# EAGLE board xr_vco_pots (EAGLE 7.3.0)
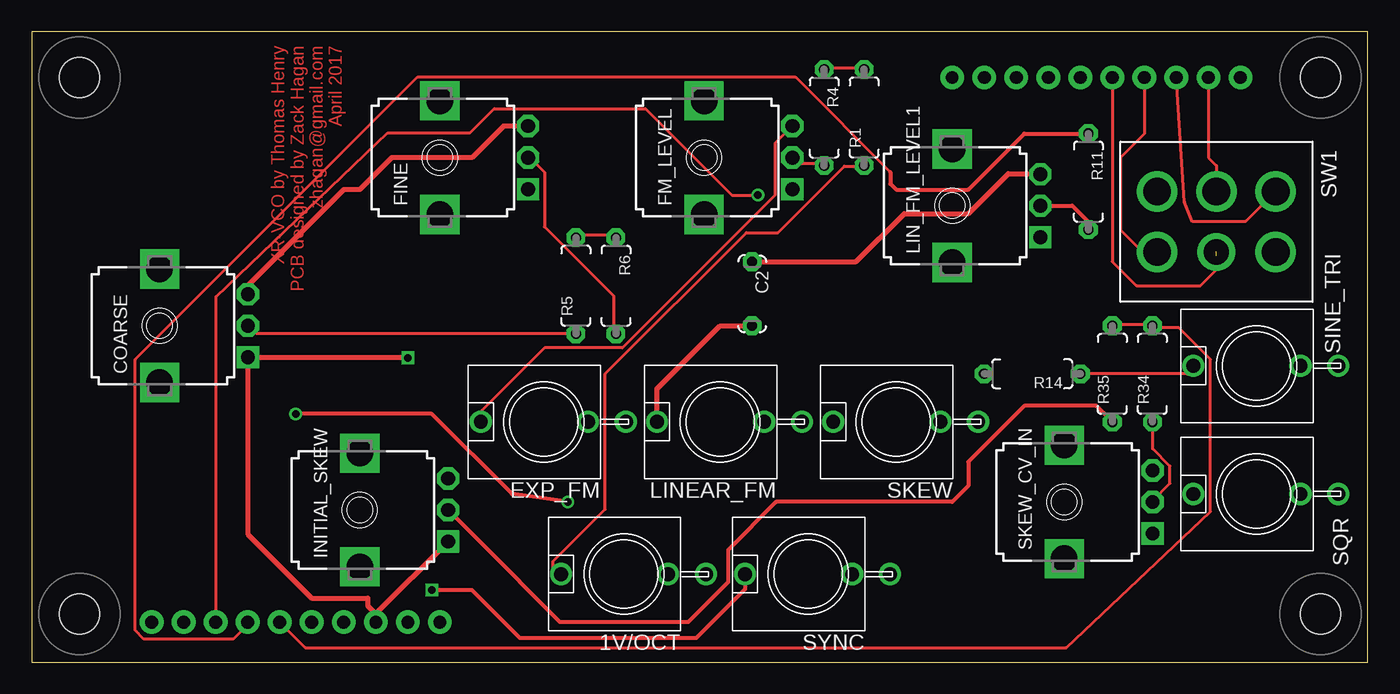
[diagram p0: board, top side]
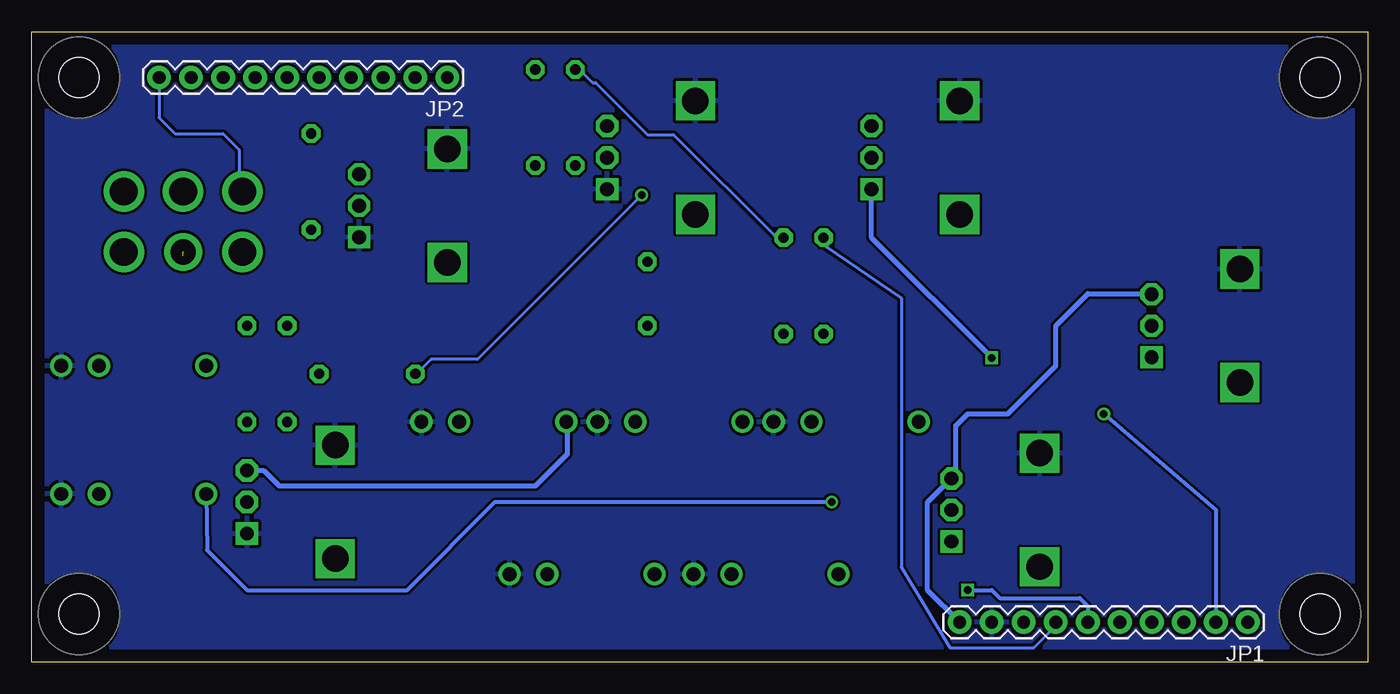
[diagram p1: board, bottom side, seen from below]

Size 106 x 50 mm. Coordinates in mm from the lower left corner, seen from the top.
Outline: 0,0 106,0 106,50 0,50 0,0
Copper layers (1*16): Top 0.035mm / dielectric 1.5mm / Bottom 0.035mm
Design rules "default *": minimum track width 10mil, minimum drill 19mil, track to track 8mil, track to pad 8mil, pad to pad 8mil, via to via 8mil, smd to smd 8mil, copper to edge 40mil, drill to drill 9mil, minimum pad ring 13mil, minimum via ring 8mil, stop-mask expansion 4mil, vias tented up to drill 0mil, thermal gap 10mil
Net classes: 1 power: width 0.406 mm; 2 ground: width 0.305 mm

## Footprints (pad centres in the part's own frame; a part is rotated, then mirrored left to right if it is on the bottom)
WQP-PJ301M-12_JACK = drill 1.1: P$1_TIP 0,5; P$2_SWITCH 0,-3.5; P$3_SLEEVE 0,-6.5
C050-024X044 = drill 0.813 octagon: 1 -2.54,0; 2 2.54,0
9MM_SNAP-IN_POT = drill 1.1 pad 1.676 square: 1 -2.5,-7 | drill 1.1 pad 1.676 octagon: 2 0,-7; 3 2.5,-7 | drill 2.1 pad 2.8 square: CHASSIS1 -4.5,0; CHASSIS2 4.5,0
1X10 = drill 1.016 pad 1.88: 1 0,0; 2 2.54,0; 3 5.08,0; 4 7.62,0; 5 10.16,0; 6 12.7,0; 7 15.24,0; 8 17.78,0; 9 20.32,0; 10 22.86,0
7MM_RESISTOR = drill 0.813 octagon: 1 -3.81,0; 2 3.81,0
DPDT = drill 2.2: A1 -2.4,4.7; A2 -2.4,0; A3 -2.4,-4.7; B1 2.4,4.7; B3 2.4,-4.7 | drill 2: B2 2.4,0
MOUNTING_HOLE = hole 3.2: 0,0

## Placement (x,y rotation side)
1V/OCT  THONKICONNNEW  [WQP-PJ301M-12_JACK]  46.99,6.99 90 top
C2  220nf  [C050-024X044]  57.15,29.21 270 top
COARSE  100k  [9MM_SNAP-IN_POT]  10.16,26.67 90 top
EXP_FM  THONKICONNNEW  [WQP-PJ301M-12_JACK]  40.64,19.05 90 top
FINE  100k  [9MM_SNAP-IN_POT]  32.38,40.01 90 top
FM_LEVEL  100k  [9MM_SNAP-IN_POT]  53.34,40.01 90 top
INITIAL_SKEW  100k  [9MM_SNAP-IN_POT]  26.04,12.06 90 top
JP1  M10"  [1X10]  9.53,3.17 180 bottom
JP2  M10"  [1X10]  73.03,46.35 180 bottom
LIN_FM_LEVEL1  100k  [9MM_SNAP-IN_POT]  73.03,36.2 90 top
LINEAR_FM  THONKICONNNEW  [WQP-PJ301M-12_JACK]  54.61,19.05 90 top
R1  100k  [7MM_RESISTOR]  66.04,43.18 90 top
R4  100k  [7MM_RESISTOR]  62.87,43.18 270 top
R5  100k  [7MM_RESISTOR]  43.18,29.84 90 top
R6  2.4M  [7MM_RESISTOR]  46.35,29.84 270 top
R11  100k  [7MM_RESISTOR]  83.82,38.1 270 top
R14  1k  [7MM_RESISTOR]  79.38,22.86 180 top
R34  100k  [7MM_RESISTOR]  88.9,22.86 90 top
R35  330k  [7MM_RESISTOR]  85.72,22.86 90 top
SINE_TRI  THONKICONNNEW  [WQP-PJ301M-12_JACK]  97.16,23.5 90 top
SKEW  THONKICONNNEW  [WQP-PJ301M-12_JACK]  68.58,19.05 90 top
SKEW_CV_IN  100k  [9MM_SNAP-IN_POT]  81.92,12.7 90 top
SQR  THONKICONNNEW  [WQP-PJ301M-12_JACK]  97.16,13.34 90 top
SW1  DPDT  [DPDT]  93.98,34.92 270 top
SYNC  THONKICONNNEW  [WQP-PJ301M-12_JACK]  61.59,6.99 90 top
U$1  [MOUNTING_HOLE]  3.81,46.35 0 top
U$2  [MOUNTING_HOLE]  3.81,3.81 0 top
U$3  [MOUNTING_HOLE]  102.23,46.35 0 top
U$4  [MOUNTING_HOLE]  102.23,3.81 0 top

## Library data of the parts
1V/OCT COARSE EXP_FM FINE FM_LEVEL INITIAL_SKEW LIN_FM_LEVEL1 LINEAR_FM R1 R4-R6 R11 R14 R34 R35 SINE_TRI SKEW SKEW_CV_IN SQR SYNC U$1-U$4 = MusicThingModular
C2 = TomW
JP1 JP2 = SparkFun-Connectors
SW1 = gm-switches

## Nets
+12V: COARSE.3 FINE.3 INITIAL_SKEW.3 JP1.10
-12V: COARSE.1 FINE.1 INITIAL_SKEW.1 JP1.8
GND: 1V/OCT.P$3_SLEEVE COARSE.CHASSIS2 EXP_FM.P$3_SLEEVE FINE.CHASSIS2 FM_LEVEL.1 FM_LEVEL.CHASSIS2 INITIAL_SKEW.CHASSIS2 JP1.9 LIN_FM_LEVEL1.1 LIN_FM_LEVEL1.CHASSIS2 LINEAR_FM.P$3_SLEEVE SINE_TRI.P$3_SLEEVE SKEW.P$3_SLEEVE SKEW_CV_IN.1 SKEW_CV_IN.CHASSIS2 SQR.P$3_SLEEVE SYNC.P$3_SLEEVE
LIN_FM_CV: JP1.4 R11.1
N$1: 1V/OCT.P$1_TIP R1.1
N$2: EXP_FM.P$1_TIP FM_LEVEL.3
N$3: FM_LEVEL.2 R4.2
N$4: COARSE.2 R5.1
N$5: FINE.2 R6.2
N$17: LIN_FM_LEVEL1.2 R11.2
N$18: R14.1 SINE_TRI.P$1_TIP
N$19: C2.1 LIN_FM_LEVEL1.3
N$20: C2.2 LINEAR_FM.P$1_TIP
N$42: SKEW.P$1_TIP SKEW_CV_IN.3
N$43: R34.1 SKEW_CV_IN.2
N$44: INITIAL_SKEW.2 R35.1
PITCH_CV: JP1.7 R1.2 R4.1 R5.2 R6.1
SINE_TRI_OUT: JP1.3 R14.2
SKEW_IN: JP1.5 R34.2 R35.2
SQR_OUT: JP1.2 SQR.P$1_TIP
SW_1: JP2.10 SW1.A3
SW_2: JP2.9 SW1.A2
SW_3: JP2.8 SW1.A1
SW_4: JP2.7 SW1.B3
SW_5: JP2.6 SW1.B2
SW_6: SW1.B1
SYNC_IN: JP1.6 SYNC.P$1_TIP

## Tracks (layer width: path | path; a pad name or v marks a point on that pad's centre or on a via)
+12V
  Top 0.406: FINE.3 37.42,42.51 34.92,40.01 28.57,40.01 26.04,37.47 24.77,37.47 17.14,29.84 17.14,29.18 COARSE.3
  Bottom 0.254: 32.69,14.4 32.92,14.4 INITIAL_SKEW.3 | 17.37,29.03 COARSE.3
  Bottom 0.305: 32.69,14.4 33.22,14.4
  Bottom 0.406: JP1.10 34.92,5.71 34.92,12.7 34.9,12.7 INITIAL_SKEW.3 | 32.69,14.4 32.69,18.75 31.75,19.68 28.57,19.68 24.77,23.5 24.77,26.67 22.23,29.21 17.2,29.21 COARSE.3
-12V  (via drill 0.6)
  Top 0.406: JP1.8 27.3,3.83 | 27.3,3.83 INITIAL_SKEW.1 | 27.3,3.83 26.67,4.47 26.67,5.08 22.23,5.08 17.16,10.14 COARSE.1 29.8,24.17 v29.84,24.13
  Bottom 0.406: v29.84,24.13 39.37,33.66 39.37,37.49 FINE.1
GND
  pour Bottom: -1.27,50.8 -1.27,-0.64 107.31,-0.64 107.31,51.44 -1.27,51.44
LIN_FM_CV
  Top 0.254: 68.12,38.86 60.58,46.41 30.63,46.41 8.23,24 8.23,2.52 8.91,1.83 16,1.83 17.14,2.97 JP1.4
  Top 0.305: 68.12,38.86 68.12,37.92 68.58,37.47 74.3,37.47 78.74,41.91 R11.1
N$1
  Top 0.254: R1.1 65.84,39.32 64.47,39.32 59.21,34.06 56.69,34.06 45.49,22.86 45.49,12.12 41.38,8 41.38,7.09 1V/OCT.P$1_TIP
N$2
  Top 0.254: EXP_FM.P$1_TIP 35.66,19.2 35.66,19.89 40.69,24.92 46.86,24.92 58.98,37.03 58.98,41.15 60.12,42.29 FM_LEVEL.3
N$3
  Top 0.254: R4.2 62.87,39.55 60.81,39.55 FM_LEVEL.2
N$4
  Top 0.254: R5.1 42.98,26.06 17.83,26.06 17.37,26.52 COARSE.2
N$5
  Top 0.254: R6.2 46.18,26.06 46.18,29.03 40.69,34.52 40.69,38.86 39.55,40.01 FINE.2
N$17
  Top 0.305: LIN_FM_LEVEL1.2 82.55,36.2 83.82,34.92 R11.2
N$18
  Top 0.254: R14.1 91.67,22.86 92.13,23.32 SINE_TRI.P$1_TIP
N$19
  Top 0.406: C2.1 65.41,31.75 69.22,35.56 74.3,35.56 77.47,38.73 79.98,38.73 LIN_FM_LEVEL1.3
N$20
  Top 0.406: LINEAR_FM.P$1_TIP 49.61,21.67 54.61,26.67 C2.2
N$42
  Bottom 0.406: SKEW_CV_IN.3 87.59,15.2 86.36,13.97 66.04,13.97 63.5,16.51 63.5,18.97 SKEW.P$1_TIP
N$43
  Top 0.254: R34.1 88.92,18.97 88.92,16.92 90.3,15.54 90.3,14.17 88.92,12.8 SKEW_CV_IN.2
N$44
  Top 0.305: R35.1 84.45,20.32 78.74,20.32 74.3,15.88 74.3,13.97 73.03,12.7 59.05,12.7 55.24,8.89 55.24,6.35 52.07,3.17 41.91,3.17 38.73,6.35 38.73,6.37 INITIAL_SKEW.2
PITCH_CV
  Top 0.254: R5.2 43.2,33.83 46.18,33.83 R6.1 | R4.1 62.87,47.09 65.84,47.09 R1.2
  Bottom 0.254: R6.1 46.41,33.83 47.09,33.83 55.09,41.83 57.15,41.83 61.27,45.95 61.49,45.95 62.41,46.86 62.87,46.86 R4.1 | JP1.7 24.92,2.97 24.92,2.74 26.52,1.14 33.15,1.14 37.01,7.54 37.01,28.85 42.98,32.92 42.98,33.6 R5.2
SINE_TRI_OUT  (via drill 0.61)
  Top 0.254: v57.61,37.03 55.55,37.03 48.69,43.89 36.7,43.89 34.77,41.96 28.25,41.96 14.63,28.98 14.63,3.2 JP1.3
  Bottom 0.254: v57.61,37.03 70.64,24 74.3,24 75.44,22.86 R14.2
SKEW_IN
  Top 0.254: R35.2 85.72,26.75 88.7,26.75 R34.2 88.92,26.52 90.98,26.52 93.5,24 93.5,11.94 82.07,1.14 21.72,1.14 JP1.5
SQR_OUT  (via drill 0.6)
  Top 0.305: v42.55,12.7 38.1,13.34 31.75,19.68 v20.95,19.68
  Bottom 0.305: SQR.P$1_TIP 92.08,8.89 88.9,5.71 76.2,5.71 69.22,12.7 v42.55,12.7 | v20.95,19.68 12.06,12.06 JP1.2
SW_1
  Bottom 0.254: JP2.10 95.89,43.18 94.61,41.91 90.81,41.91 89.53,40.64 89.53,37.58 SW1.A3
SW_2
  Top 0.254: JP2.9 93.34,40.01 93.98,39.37 SW1.A2
SW_3
  Top 0.254: JP2.8 91.44,36.51 92.08,34.92 96.28,34.92 SW1.A1
SW_4
  Top 0.254: JP2.7 88.27,41.91 86.36,40.01 86.36,34.29 88.27,32.38 89.14,32.38 SW1.B3
SW_5  (1 unrouted)
  Top 0.254: JP2.6 85.72,31.75 87.63,29.84 92.71,29.84 93.98,31.11 SW1.B2
SYNC_IN  (via drill 0.6)
  Top 0.305: SYNC.P$1_TIP 56.59,5.79 52.7,1.91 38.73,1.91 34.92,5.71 v31.75,5.71
  Bottom 0.305: v31.75,5.71 29.84,5.71 29.21,5.08 22.86,5.08 22.23,4.45 JP1.6

## Text on the board
Top: XR-VCO by Thomas Henry / PCB designed by Zack Hagan / zhagan@gmail.com / April 2017